# EAGLE board User Port (EAGLE 9.6.2)
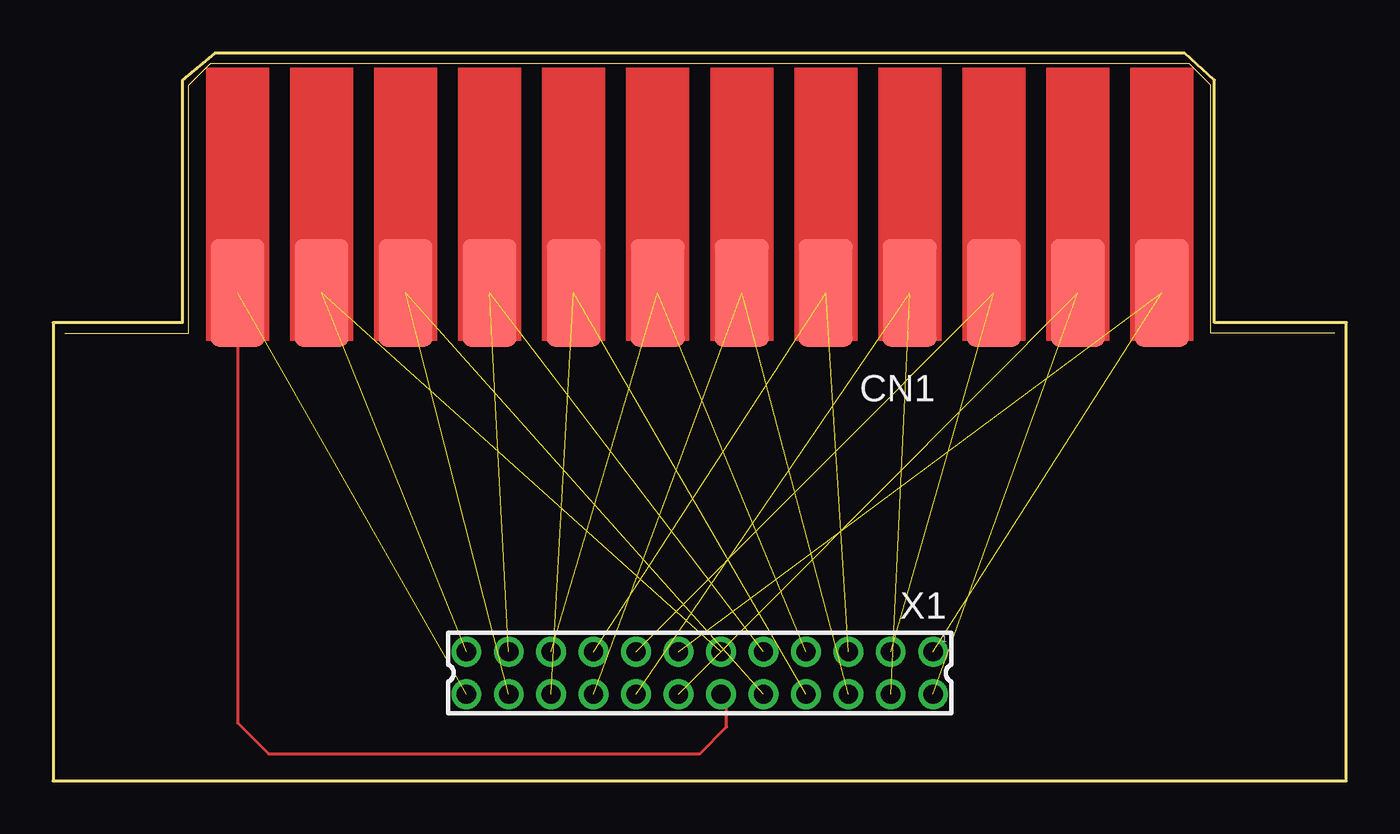
[diagram p0: board, top side]
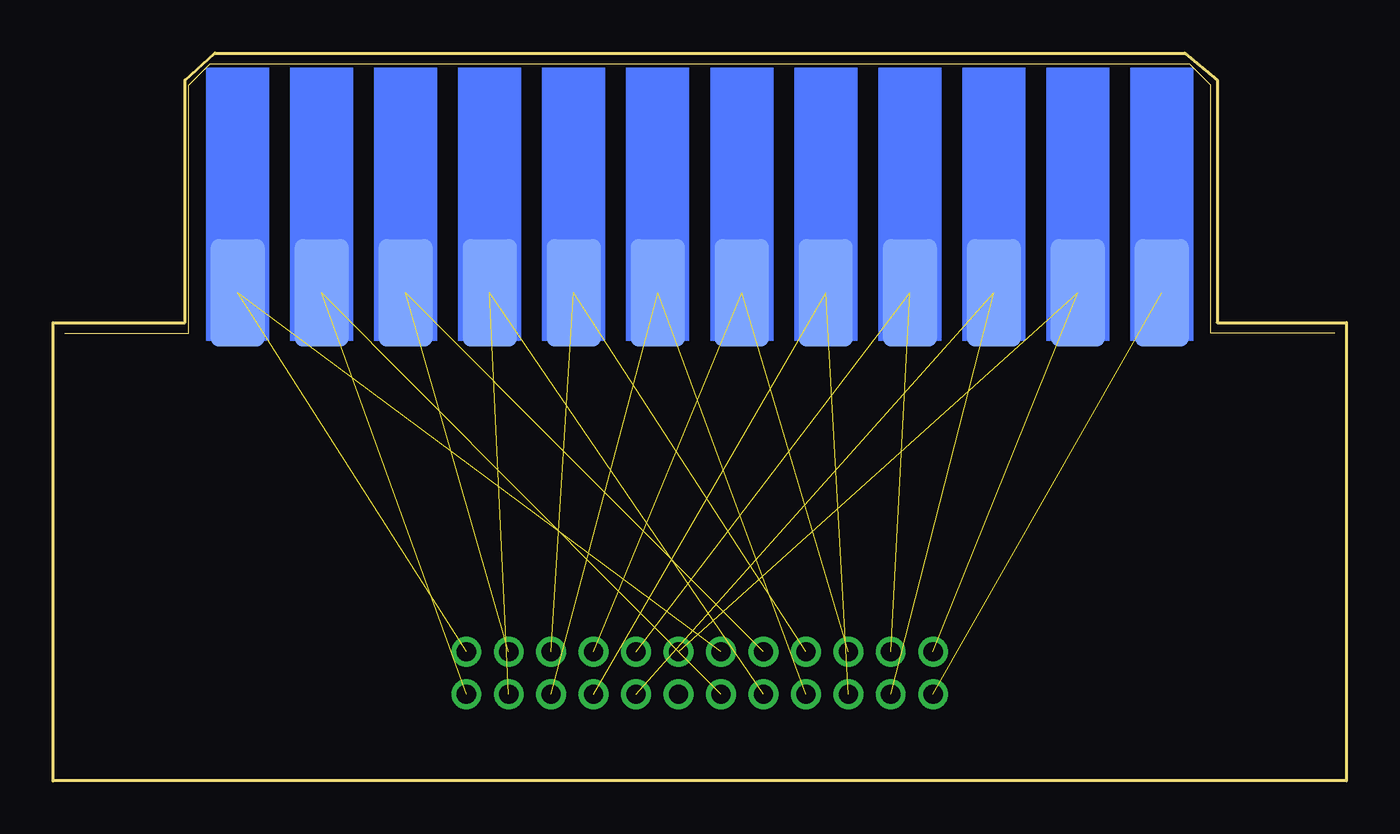
[diagram p1: board, bottom side, seen from below]

Size 60.96 x 34.29 mm. Coordinates in mm from the lower left corner, seen from the top.
Outline: 6.1,21.59 0,21.59 0,0 60.96,0 60.96,21.59 54.74,21.59 54.74,33.02 53.34,34.29 7.62,34.29 6.1,33.02 6.1,21.59
Copper layers (1*16): Top 0.035mm / dielectric 1.5mm / Bottom 0.035mm
Design rules "default": minimum track width 6mil, minimum drill 0.35mm, track to track 6mil, track to pad 6mil, pad to pad 6mil, via to via 6mil, smd to smd 6mil, copper to edge 40mil, drill to drill 6mil, minimum pad ring 10mil, minimum via ring 8mil, stop-mask expansion 4mil, vias tented up to drill 0mil, thermal gap 10mil

## Footprints (pad centres in the part's own frame; a part is rotated, then mirrored left to right if it is on the bottom)
UPS24EDGE = smd 2.54 x 5.08: 1 -21.779,3.68; 2 -17.819,3.68; 3 -13.859,3.68; 4 -9.899,3.68; 5 -5.939,3.68; 6 -1.979,3.68; 7 1.981,3.68; 8 5.941,3.68; 9 9.901,3.68; 10 13.861,3.68; 11 17.821,3.68; 12 21.781,3.68 | smd 2.54 x 5.08 bottom: A -21.779,3.68; B -17.819,3.68; C -13.859,3.68; D -9.899,3.68; E -5.939,3.68; F -1.979,3.68; H 1.981,3.68; J 5.941,3.68; K 9.901,3.68; L 13.861,3.68; M 17.821,3.68; N 21.781,3.68
87758-2416 = drill 0.9 pad 1.27: 1 -11,-1; 2 -11,1; 3 -9,-1; 4 -9,1; 5 -7,-1; 6 -7,1; 7 -5,-1; 8 -5,1; 9 -3,-1; 10 -3,1; 11 -1,-1; 12 -1,1; 13 1,-1; 14 1,1; 15 3,-1; 16 3,1; 17 5,-1; 18 5,1; 19 7,-1; 20 7,1; 21 9,-1; 22 9,1; 23 11,-1; 24 11,1

## Placement (x,y rotation side)
CN1  USERPORT-C64-EDGE  [UPS24EDGE]  30.48,26.67 180 top
X1  87758-2416  [87758-2416]  30.48,5.08 180 top

## Library data of the parts
CN1 = 0RB_Commodore
X1 = con-molex; MF: MOLEX; MPN: 87758-2416; OC_FARNELL: unknown; OC_NEWARK: 25M5679

## Nets
N$1: CN1.1 X1.1
N$2: CN1.2 X1.2
N$3: CN1.3 X1.3
N$4: CN1.4 X1.4
N$5: CN1.5 X1.5
N$6: CN1.6 X1.6
N$7: CN1.7 X1.7
N$8: CN1.8 X1.8
N$9: CN1.9 X1.9
N$10: CN1.10 X1.10
N$11: CN1.11 X1.11
N$12: CN1.12 X1.12
N$13: CN1.A X1.13
N$14: CN1.B X1.14
N$15: CN1.C X1.15
N$16: CN1.D X1.16
N$17: CN1.E X1.17
N$18: CN1.F X1.18
N$19: CN1.H X1.19
N$20: CN1.J X1.20
N$21: CN1.K X1.21
N$22: CN1.L X1.22
N$23: CN1.M X1.23
N$24: CN1.N X1.24

## Tracks (layer width: path | path; a pad name or v marks a point on that pad's centre or on a via)
N$1  (1 unrouted)
N$2  (1 unrouted)
N$3  (1 unrouted)
N$4  (1 unrouted)
N$5  (1 unrouted)
N$6  (1 unrouted)
N$7  (1 unrouted)
N$8  (1 unrouted)
N$9  (1 unrouted)
N$10  (1 unrouted)
N$11  (1 unrouted)
N$12
  Top 0.152: CN1.12 8.7,2.73 10.16,1.27 30.48,1.27 31.75,2.54 31.75,3.81 X1.12
N$13  (1 unrouted)
N$14  (1 unrouted)
N$15  (1 unrouted)
N$16  (1 unrouted)
N$17  (1 unrouted)
N$18  (1 unrouted)
N$19  (1 unrouted)
N$20  (1 unrouted)
N$21  (1 unrouted)
N$22  (1 unrouted)
N$23  (1 unrouted)
N$24  (1 unrouted)